# Altium PCB PCB Ruler v1.0.PcbDoc
Units mm, origin at the board's own origin, x right, y up, seen from the top; angles counter-clockwise.
Board outline 100 x 32 mm, 2 copper layers (Top Layer, Bottom Layer), stack 1.571 mm thick; 28 components, 0 nets, 449 pads, 0 vias.
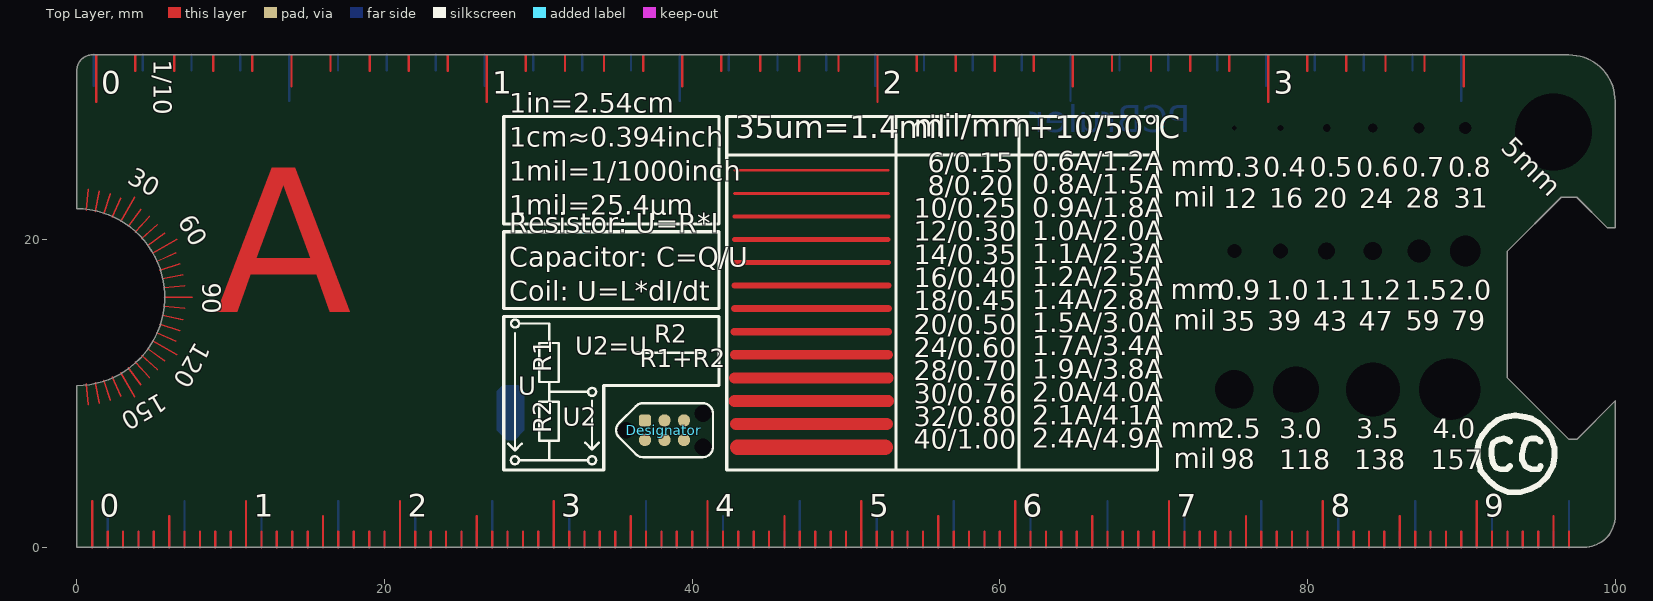
[diagram p0: Top Layer view]
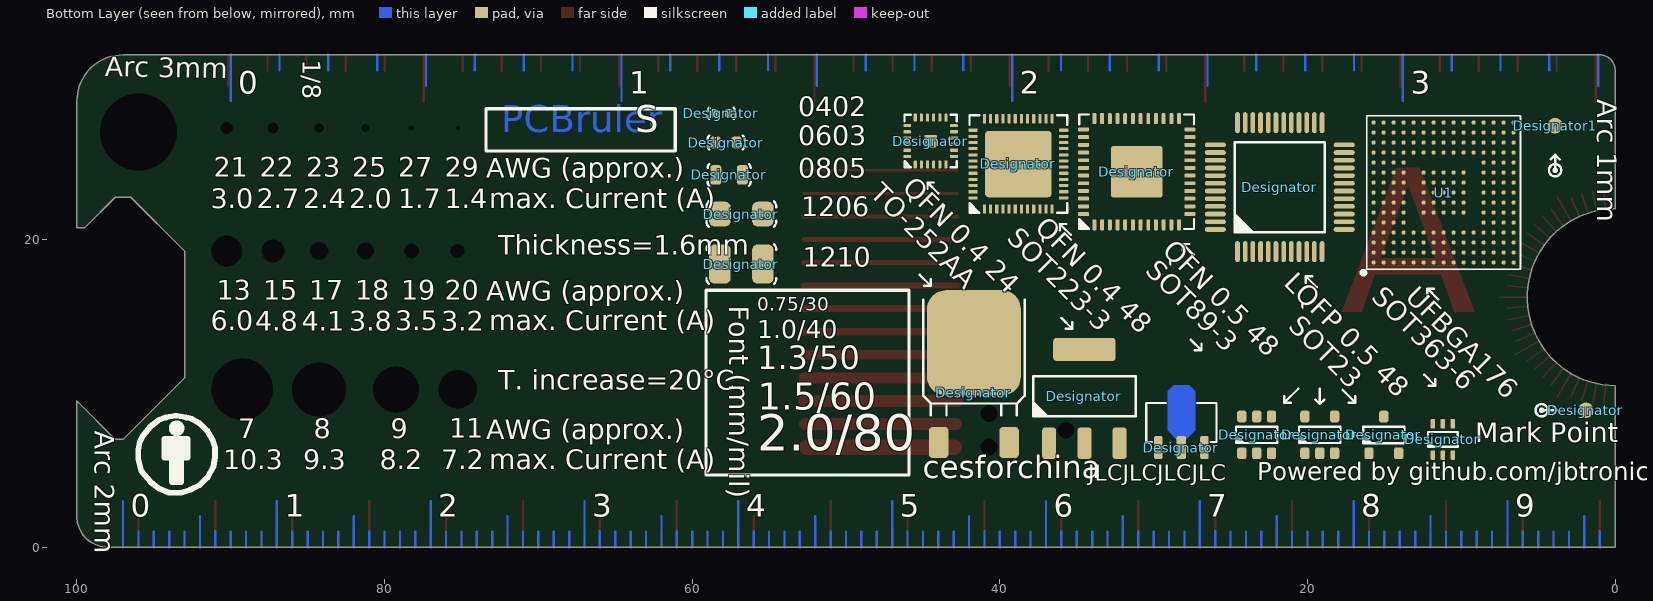
[diagram p1: Bottom Layer view, seen from below]

## Layer stack, top to bottom
Top Solder: solder mask 0.0102, Solder Resist, Dk 3.5
Top Layer: signal copper 0.0356
Dielectric 1: dielectric 1.5, FR-4, Dk 4.8
Bottom Layer: signal copper 0.0356
Bottom Solder: solder mask 0.0102, Solder Resist, Dk 3.5

## Board outline
0,0 0,10.5 ccw(c-0.038,16.25) 0,22 0,31 cw(c1,31) 1,32 97,32 cw(c97,29) 100,29 100,20.75 99.5,20.75 97.5,22.75 96.5,22.75 93,19.25 93,11 97,7 97.5,7 100,9.5 100,2 cw(c98,2) 98,0

## Design rules (kind name [scope] priority, off if disabled: settings)
Clearance [All] p1: gap=0 ignorepadtopadclearanceinfootprint=TRUE
PolygonConnect [All] p1: connectstyle=Relief reliefconductorwidth=0.254 reliefentries=4 polygonreliefangle="90 Angle" airgapwidth=0.254
RoutingVias [All] p1: holewidth=0.711 width=1.27 viastyle="Through Hole" minholewidth=0.711 minwidth=1.27 maxholewidth=0.711 maxwidth=1.27
SolderMaskExpansion [All] p1: expansion=0.102
Width [All] p1: maxlimit=2.032 minlimit=0.1 preferedwidth=0.203 minimp=50.000000 maximp=50.000000 favimp=50.000000
30 further rules are at their usual default settings.

## Components (designator, comment, footprint, x,y, rotation, side; value= is the part's Value field where it differs from the comment)
Designator "Comment" "Mark 1" 1.9,8.9 r0 bottom
Designator "Comment" LQFP_P0.5_48 21.8,23.4 r90 bottom
Designator "Comment" QFN_P0.5_48 31.1,24.403 r90 bottom
Designator "Comment" QFN_P0.4_48 38.797,24.903 r90 bottom
Designator "Comment" TO-252AA 43.972,6.8 r180 bottom
Designator "Comment" SOT223-3 34.5,9.8 r90 bottom
Designator "Comment" SOT89-3 28.2,8.1 r90 bottom
Designator "Comment" SOT363-6 11.2,7 r90 bottom
Designator "Comment" SOT23-6 23.3,7.3 r90 bottom
Designator "Comment" SOT23-5 19.2,7.3 r90 bottom
Designator "Comment" SOT23-3 15.035,7.294 r90 bottom
Designator "Comment" QFN_P0.4_24 44.5,26.4 r90 bottom
Designator "Comment" "C 0805" 57.6,24.2 r0 bottom
Designator "Comment" "C 0603" 57.8,26.303 r180 bottom
Designator "Comment" "C 0402" 58.1,28.2 r180 bottom
Designator "Comment" "C 1210" 56.8,18.4 r180 bottom
Designator "Comment" "C 1206" 56.8,21.653 r180 bottom
Designator "Comment" "Flash Herder 6P" 38.2,7.6 r0 top
Designator1 "Comment" "Mark 1" 3.9,27.4 r0 bottom
REF "Inch_Ruler_3.5in_10" INCH_RULER_3.5IN_10 -85,130 r0 top
REF "Degree_Scale" DEGREE_SCALE -85,130 r0 top
REF "Metric_Ruler_90mm" METRIC_RULER_96MM -85,130 r0 top
REF1 "Voltage Divider" VOLTAGE_DIVIDER -84.96,130.039 r0 top (schematic designator REF)
REF2 "" SYMBOL_CREATIVECOMMONS_SILKTOP_TYPE2_SMALL -85.343,130.214 r0 top (schematic designator REF)
REF3 "" SYMBOL_CC-ATTRIBUTION_SILKTOP_SMALL -85.488,130.287 r0 bottom (schematic designator REF)
REF_1 "Inch_Ruler_3.5in_8" INCH_RULER_3.5IN_8 -85,130 r0 bottom (schematic designator REF)
REF_1 "Metric_Ruler_90mm" METRIC_RULER_96MM -85,130 r0 bottom (schematic designator REF)
U1 "STM32F765IIK6" UFBGA176 11.15,23.05 r90 bottom

## Footprints (in the part's own frame and the unit in brackets; to place one, negate y for a bottom-side part, rotate by r counter-clockwise, add the part's x,y. Pads: shape width x height; smd on the part's side, far side on the other; paste and mask are expansions set on the pad)
"C 0402" [mil] "无极性贴片电容"
  rrect50% 19x21 smd: 1(-18.5,0) 2(18.5,0)
  silkscreen extent -35,-14 35,14
"C 0603" [mil] "无极性贴片电容"
  rrect50% 26x30 smd: 1(-27,0) 2(27,0)
  silkscreen extent -47,-18 47,18
"C 0805" [mil] "无极性贴片电容"
  rrect50% 28x50 smd: 1(-34,0) 2(34,0)
  silkscreen extent -55,-28 55,28
"C 1206" [mil] "无极性贴片电容"
  rrect50% 55x63 smd: 1(-55,0) 2(55,0)
  silkscreen extent -90,-32 90,32
"C 1210" [mil] "无极性贴片电容"
  rrect50% 55x100 smd: 1(-55,0) 2(55,0)
  silkscreen extent -90,-51 90,51
DEGREE_SCALE [mm]
  Top Layer lines w0.1: 85.594,-119.394 85.736,-120.75 ; 85.594,-108.092 85.736,-106.736 ; 86.181,-119.3 86.465,-120.635 ; 86.181,-108.185 86.465,-106.851 ; 86.755,-119.147 87.177,-120.443 ; 86.755,-108.339 87.177,-107.042 ; 87.311,-118.933 87.865,-120.179 ; 87.311,-108.552 87.865,-107.307 ; 87.841,-118.663 88.75,-120.238 ; 87.841,-108.822 88.75,-107.248 ; 88.339,-118.34 89.141,-119.443 ; 88.339,-109.146 89.141,-108.043 ; 88.802,-117.965 89.714,-118.979 ; 88.802,-109.52 89.714,-108.507 ; 89.222,-117.545 90.236,-118.457 ; 89.222,-109.941 90.236,-109.028 ; 89.596,-117.083 90.7,-117.884 ; 89.596,-110.403 90.7,-109.602 ; 89.92,-116.584 91.495,-117.493 ; 89.92,-110.902 91.495,-109.993 ; 90.19,-116.054 91.436,-116.609 ; 90.19,-111.432 91.436,-110.877 ; 90.404,-115.499 91.7,-115.92 ; 90.404,-111.987 91.7,-111.566 ; 90.558,-114.924 91.891,-115.208 ; 90.558,-112.562 91.891,-112.278 ; 90.651,-114.337 92.007,-114.479 ; 90.651,-113.149 92.007,-113.007 ; 90.682,-113.743 92.5,-113.743
"Flash Herder 6P" [mm]
  rrect50% 0.8x0.8 smd: 1(-1.27,0.635)
  round 0.8 smd: 2(-1.27,-0.635) 3(0,0.635) 4(0,-0.635) 5(1.27,0.635) 6(1.27,-0.635)
  round 0 hole 1.1 unplated mask+0: ""(-2.5,0) ""(2.5,-1.1) ""(2.5,1.1)
  silkscreen extent -3.15,-1.75 3.15,1.75
INCH_RULER_3.5IN_8 [mm]
  Top Layer lines w0.15: 86.1,100 86.1,98 ; 89.275,99 89.275,98 ; 92.45,99 92.45,98 ; 95.625,99 95.625,98 ; 98.8,101 98.8,98 ; 101.975,99 101.975,98 ; 105.15,99 105.15,98 ; 108.325,99 108.325,98 ; 111.5,100 111.5,98 ; 114.675,99 114.675,98 ; 117.85,99 117.85,98 ; 121.025,99 121.025,98 ; 124.2,101 124.2,98 ; 127.375,99 127.375,98 ; 130.55,99 130.55,98 ; 133.725,99 133.725,98 ; 136.9,100 136.9,98 ; 140.075,99 140.075,98 ; 143.25,99 143.25,98 ; 146.425,99 146.425,98 ; 149.6,101 149.6,98 ; 152.775,99 152.775,98 ; 155.95,99 155.95,98 ; 159.125,99 159.125,98 ; 162.3,100 162.3,98 ; 165.475,99 165.475,98 ; 168.65,99 168.65,98 ; 171.825,99 171.825,98 ; 175,101 175,98
INCH_RULER_3.5IN_10 [mm]
  Top Layer lines w0.15: 86.25,-101.061 86.25,-98.013 ; 88.79,-99.029 88.79,-98.013 ; 91.33,-99.029 91.33,-98.013 ; 93.87,-99.029 93.87,-98.013 ; 96.41,-99.029 96.41,-98.013 ; 98.95,-100.045 98.95,-98.013 ; 101.49,-99.029 101.49,-98.013 ; 104.03,-99.029 104.03,-98.013 ; 106.57,-99.029 106.57,-98.013 ; 109.11,-99.029 109.11,-98.013 ; 111.65,-101.061 111.65,-98.013 ; 114.19,-99.029 114.19,-98.013 ; 116.73,-99.029 116.73,-98.013 ; 119.27,-99.029 119.27,-98.013 ; 121.81,-99.029 121.81,-98.013 ; 124.35,-100.045 124.35,-98.013 ; 126.89,-99.029 126.89,-98.013 ; 129.43,-99.029 129.43,-98.013 ; 131.97,-99.029 131.97,-98.013 ; 134.51,-99.029 134.51,-98.013 ; 137.05,-101.061 137.05,-98.013 ; 139.59,-99.029 139.59,-98.013 ; 142.13,-99.029 142.13,-98.013 ; 144.67,-99.029 144.67,-98.013 ; 147.21,-99.029 147.21,-98.013 ; 149.75,-100.045 149.75,-98.013 ; 152.29,-99.029 152.29,-98.013 ; 154.83,-99.029 154.83,-98.013 ; 157.37,-99.029 157.37,-98.013 ; 159.91,-99.029 159.91,-98.013 ; 162.45,-101.061 162.45,-98.013 ; 164.99,-99.029 164.99,-98.013 ; 167.53,-99.029 167.53,-98.013 ; 170.07,-99.029 170.07,-98.013 ; 172.61,-99.029 172.61,-98.013 ; 175.15,-100.045 175.15,-98.013
LQFP_P0.5_48 [mil]
  oval 54x12 smd: 1(-165,108.27) 2(-165,88.58) 3(-165,68.9) 4(-165,49.21) 5(-165,29.53) 6(-165,9.84) 7(-165,-9.84) 8(-165,-29.53) 9(-165,-49.21) 10(-165,-68.9) 11(-165,-88.58) 12(-165,-108.27) 25(165,-108.27) 26(165,-88.58) 27(165,-68.9) 28(165,-49.21) 29(165,-29.53) 30(165,-9.84) 31(165,9.84) 32(165,29.53) 33(165,49.21) 34(165,68.9) 35(165,88.58) 36(165,108.27)
  oval 12x54 smd: 13(-108.27,-165) 14(-88.58,-165) 15(-68.9,-165) 16(-49.21,-165) 17(-29.53,-165) 18(-9.84,-165) 19(9.84,-165) 20(29.53,-165) 21(49.21,-165) 22(68.9,-165) 23(88.58,-165) 24(108.27,-165) 37(108.27,165) 38(88.58,165) 39(68.9,165) 40(49.21,165) 41(29.53,165) 42(9.84,165) 43(-9.84,165) 44(-29.53,165) 45(-49.21,165) 46(-68.9,165) 47(-88.58,165) 48(-108.27,165)
  silkscreen extent -115,-115 115,115
"Mark 1" [mm] "光学定位点，直径1mm"
  round 1 smd paste-1 mask+0.635: Mark(0,0)
  Top Layer pour cut-out: 0,-1.143 -0.437,-1.056 -0.808,-0.808 -1.056,-0.437 -1.143,0 -1.143,0 -1.056,0.437 -0.808,0.808 -0.437,1.056 0,1.143 0,1.143 0.437,1.056 0.808,0.808 1.056,0.437 1.143,0 1.143,0 1.056,-0.437 0.808,-0.808 0.437,-1.056 0,-1.143
METRIC_RULER_96MM [mm]
  Top Layer lines w0.15: 86,-130 86,-127 ; 87,-130 87,-129 ; 88,-130 88,-129 ; 89,-130 89,-129 ; 90,-130 90,-129 ; 91,-130 91,-128 ; 92,-130 92,-129 ; 93,-130 93,-129 ; 94,-130 94,-129 ; 95,-130 95,-129 ; 96,-130 96,-127 ; 97,-130 97,-129 ; 98,-130 98,-129 ; 99,-130 99,-129 ; 100,-130 100,-129 ; 101,-130 101,-128 ; 102,-130 102,-129 ; 103,-130 103,-129 ; 104,-130 104,-129 ; 105,-130 105,-129 ; 106,-130 106,-127 ; 107,-130 107,-129 ; 108,-130 108,-129 ; 109,-130 109,-129 ; 110,-130 110,-129 ; 111,-130 111,-128 ; 112,-130 112,-129 ; 113,-130 113,-129 ; 114,-130 114,-129 ; 115,-130 115,-129 ; 116,-130 116,-127 ; 117,-130 117,-129 ; 118,-130 118,-129 ; 119,-130 119,-129 ; 120,-130 120,-129 ; 121,-130 121,-128 ; 122,-130 122,-129 ; 123,-130 123,-129 ; 124,-130 124,-129 ; 125,-130 125,-129 ; 126,-130 126,-127 ; 127,-130 127,-129 ; 128,-130 128,-129 ; 129,-130 129,-129 ; 130,-130 130,-129 ; 131,-130 131,-128 ; 132,-130 132,-129 ; 133,-130 133,-129 ; 134,-130 134,-129 ; 135,-130 135,-129 ; 136,-130 136,-127 ; 137,-130 137,-129 ; 138,-130 138,-129 ; 139,-130 139,-129 ; 140,-130 140,-129 ; 141,-130 141,-128 ; 142,-130 142,-129 ; 143,-130 143,-129 ; 144,-130 144,-129 ; 145,-130 145,-129 ; 146,-130 146,-127 ; 147,-130 147,-129 ; 148,-130 148,-129 ; 149,-130 149,-129 ; 150,-130 150,-129 ; 151,-130 151,-128 ; 152,-130 152,-129 ; 153,-130 153,-129 ; 154,-130 154,-129 ; 155,-130 155,-129 ; 156,-130 156,-127 ; 157,-130 157,-129 ; 158,-130 158,-129 ; 159,-130 159,-129 ; 160,-130 160,-129 ; 161,-130 161,-128 ; 162,-130 162,-129 ; 163,-130 163,-129 ; 164,-130 164,-129 ; 165,-130 165,-129 ; 166,-130 166,-127 ; 167,-130 167,-129 ; 168,-130 168,-129 ; 169,-130 169,-129 ; 170,-130 170,-129 ; 171,-130 171,-128 ; 172,-130 172,-129 ; 173,-130 173,-129 ; 174,-130 174,-129 ; 175,-130 175,-129 ; 176,-130 176,-127 ; 177,-130 177,-129 ; 178,-130 178,-129 ; 179,-130 179,-129 ; 180,-130 180,-129 ; 181,-130 181,-128 ; 182,-130 182,-129
QFN_P0.4_24 [mil]
  rrect50% 20x8 smd: 1(-60,39.37) 2(-60,23.62) 3(-60,7.87) 4(-60,-7.87) 5(-60,-23.62) 6(-60,-39.37) 13(60,-39.37) 14(60,-23.62) 15(60,-7.87) 16(60,7.87) 17(60,23.62) 18(60,39.37)
  rrect50% 8x20 smd: 7(-39.37,-60) 8(-23.62,-60) 9(-7.87,-60) 10(7.87,-60) 11(23.62,-60) 12(39.37,-60) 19(39.37,60) 20(23.62,60) 21(7.87,60) 22(-7.87,60) 23(-23.62,60) 24(-39.37,60)
  rrect20% 32x32 smd: 25(0,0)
  silkscreen extent -67,-67 67,67
QFN_P0.4_48 [mil]
  rrect50% 24x8 smd: 1(-115,86.61) 2(-115,70.87) 3(-115,55.12) 4(-115,39.37) 5(-115,23.62) 6(-115,7.87) 7(-115,-7.87) 8(-115,-23.62) 9(-115,-39.37) 10(-115,-55.12) 11(-115,-70.87) 12(-115,-86.61) 25(116,-86.61) 26(116,-70.87) 27(116,-55.12) 28(116,-39.37) 29(116,-23.62) 30(116,-7.87) 31(116,7.87) 32(116,23.62) 33(116,39.37) 34(116,55.12) 35(116,70.87) 36(116,86.61)
  rrect50% 8x24 smd: 13(-86.61,-116) 14(-70.87,-116) 15(-55.12,-116) 16(-39.37,-116) 17(-23.62,-116) 18(-7.87,-116) 19(7.87,-116) 20(23.62,-116) 21(39.37,-116) 22(55.12,-116) 23(70.87,-116) 24(86.61,-116) 37(86.61,116) 38(70.87,116) 39(55.12,116) 40(39.37,116) 41(23.62,116) 42(7.87,116) 43(-7.87,116) 44(-23.62,116) 45(-39.37,116) 46(-55.12,116) 47(-70.87,116) 48(-86.61,116)
  rrect10% 170x170 smd paste-173.23 mask+1.97: 49(0,0)
  rrect20% 50x50 on Bottom Paste mask+1.97: Paste1(0,0) Paste2(-55,55) Paste3(-55,-55) Paste4(55,-55) Paste5(55,55) Paste6(55,0) Paste7(-55,0) Paste8(0,55) Paste9(0,-55)
  silkscreen extent -125,-125 125,125
QFN_P0.5_48 [mil]
  rrect50% 28x10 smd: 1(-136,108.27) 2(-136,88.58) 3(-136,68.9) 4(-136,49.21) 5(-136,29.53) 6(-136,9.84) 7(-136,-9.84) 8(-136,-29.53) 9(-136,-49.21) 10(-136,-68.9) 11(-136,-88.58) 12(-136,-108.27) 25(136,-108.27) 26(136,-88.58) 27(136,-68.9) 28(136,-49.21) 29(136,-29.53) 30(136,-9.84) 31(136,9.84) 32(136,29.53) 33(136,49.21) 34(136,68.9) 35(136,88.58) 36(136,108.27)
  rrect50% 10x28 smd: 13(-108.27,-136) 14(-88.58,-136) 15(-68.9,-136) 16(-49.21,-136) 17(-29.53,-136) 18(-9.84,-136) 19(9.84,-136) 20(29.53,-136) 21(49.21,-136) 22(68.9,-136) 23(88.58,-136) 24(108.27,-136) 37(108.27,136) 38(88.58,136) 39(68.9,136) 40(49.21,136) 41(29.53,136) 42(9.84,136) 43(-9.84,136) 44(-29.53,136) 45(-49.21,136) 46(-68.9,136) 47(-88.58,136) 48(-108.27,136)
  rrect10% 132x132 smd: 49(0,0)
  silkscreen extent -147,-147 147,147
SOT23-3 [mil]
  rrect50% 30x24 smd: 1(-47,38) 2(-47,-38) 3(47,0)
  silkscreen extent -21,-53 21,53
SOT23-5 [mil]
  rrect50% 30x24 smd: 1(-47,38) 2(-47,0) 3(-47,-38) 4(47,-38) 5(47,38)
  silkscreen extent -21,-53 21,53
SOT23-6 [mil]
  rrect50% 30x24 smd: 1(-47,38) 2(-47,0) 3(-47,-38) 4(47,-38) 5(47,0) 6(47,38)
  silkscreen extent -21,-53 21,53
SOT89-3 [mil]
  rrect50% 60x22 smd: 1(-64,59.06) 3(-64,-59.06)
  rrect50% 60x24 smd: 2(-64,0)
  Top Layer region: -45,10 -20,35 80,35 95,20 95,-20 80,-35 -20,-35 -45,-10
  silkscreen extent -50,-90 50,90
SOT223-3 [mil]
  rrect40% 80x36 smd: 1(-120,90.16) 2(-120,0) 3(-120,-90.16)
  rrect30% 60x160 smd: 4(120,0)
  silkscreen extent -51,-131 51,131
SOT363-6 [mil]
  rrect50% 24x12 smd: 1(-40,25.59) 2(-40,0) 3(-40,-25.59) 4(40,-25.59) 5(40,0) 6(40,25.59)
  silkscreen extent -19,-38 19,38
SYMBOL_CC-ATTRIBUTION_SILKTOP_SMALL [mm]
  silkscreen extent 176.5,121.75 181.5,126.75
SYMBOL_CREATIVECOMMONS_SILKTOP_TYPE2_SMALL [mm]
  silkscreen extent 176.4,-126.65 181.4,-121.65
TO-252AA [mil]
  rrect40% 50x80 smd: 1(0,0) 3(180,0)
  rrect40% 240x270 smd: 4(90,255)
  silkscreen extent -40,70 220,365
UFBGA176 [mm]
  round 0.27 smd: A1(-4.55,4.55) A2(-3.9,4.55) A3(-3.25,4.55) A4(-2.6,4.55) A5(-1.95,4.55) A6(-1.3,4.55) A7(-0.65,4.55) A8(0,4.55) A9(0.65,4.55) A10(1.3,4.55) A11(1.95,4.55) A12(2.6,4.55) A13(3.25,4.55) A14(3.9,4.55) A15(4.55,4.55) B1(-4.55,3.9) B2(-3.9,3.9) B3(-3.25,3.9) B4(-2.6,3.9) B5(-1.95,3.9) B6(-1.3,3.9) B7(-0.65,3.9) B8(0,3.9) B9(0.65,3.9) B10(1.3,3.9) B11(1.95,3.9) B12(2.6,3.9) B13(3.25,3.9) B14(3.9,3.9) B15(4.55,3.9) C1(-4.55,3.25) C2(-3.9,3.25) C3(-3.25,3.25) C4(-2.6,3.25) C5(-1.95,3.25) C6(-1.3,3.25) C7(-0.65,3.25) C8(0,3.25) C9(0.65,3.25) C10(1.3,3.25) C11(1.95,3.25) C12(2.6,3.25) C13(3.25,3.25) C14(3.9,3.25) C15(4.55,3.25) D1(-4.55,2.6) D2(-3.9,2.6) D3(-3.25,2.6) D4(-2.6,2.6) D5(-1.95,2.6) D6(-1.3,2.6) D7(-0.65,2.6) D8(0,2.6) D9(0.65,2.6) D10(1.3,2.6) D11(1.95,2.6) D12(2.6,2.6) D13(3.25,2.6) D14(3.9,2.6) D15(4.55,2.6) E1(-4.55,1.95) E2(-3.9,1.95) E3(-3.25,1.95) E4(-2.6,1.95) E12(2.6,1.95) E13(3.25,1.95) E14(3.9,1.95) E15(4.55,1.95) F1(-4.55,1.3) F2(-3.9,1.3) F3(-3.25,1.3) F4(-2.6,1.3) F6(-1.3,1.3) F7(-0.65,1.3) F8(0,1.3) F9(0.65,1.3) F10(1.3,1.3) F12(2.6,1.3) F13(3.25,1.3) F14(3.9,1.3) F15(4.55,1.3) G1(-4.55,0.65) G2(-3.9,0.65) G3(-3.25,0.65) G4(-2.6,0.65) G6(-1.3,0.65) G7(-0.65,0.65) G8(0,0.65) G9(0.65,0.65) G10(1.3,0.65) G12(2.6,0.65) G13(3.25,0.65) G14(3.9,0.65) G15(4.55,0.65) H1(-4.55,0) H2(-3.9,0) H3(-3.25,0) H4(-2.6,0) H6(-1.3,0) H7(-0.65,0) H8(0,0) H9(0.65,0) H10(1.3,0) H12(2.6,0) H13(3.25,0) H14(3.9,0) H15(4.55,0) J1(-4.55,-0.65) J2(-3.9,-0.65) J3(-3.25,-0.65) J4(-2.6,-0.65) J6(-1.3,-0.65) J7(-0.65,-0.65) J8(0,-0.65) J9(0.65,-0.65) J10(1.3,-0.65) J12(2.6,-0.65) J13(3.25,-0.65) J14(3.9,-0.65) J15(4.55,-0.65) K1(-4.55,-1.3) K2(-3.9,-1.3) K3(-3.25,-1.3) K4(-2.6,-1.3) K6(-1.3,-1.3) K7(-0.65,-1.3) K8(0,-1.3) K9(0.65,-1.3) K10(1.3,-1.3) K12(2.6,-1.3) K13(3.25,-1.3) K14(3.9,-1.3) K15(4.55,-1.3) L1(-4.55,-1.95) L2(-3.9,-1.95) L3(-3.25,-1.95) L4(-2.6,-1.95) L12(2.6,-1.95) L13(3.25,-1.95) L14(3.9,-1.95) L15(4.55,-1.95) M1(-4.55,-2.6) M2(-3.9,-2.6) M3(-3.25,-2.6) M4(-2.6,-2.6) M5(-1.95,-2.6) M6(-1.3,-2.6) M7(-0.65,-2.6) M8(0,-2.6) M9(0.65,-2.6) M10(1.3,-2.6) M11(1.95,-2.6) M12(2.6,-2.6) M13(3.25,-2.6) M14(3.9,-2.6) M15(4.55,-2.6) N1(-4.55,-3.25) N2(-3.9,-3.25) N3(-3.25,-3.25) N4(-2.6,-3.25) N5(-1.95,-3.25) N6(-1.3,-3.25) N7(-0.65,-3.25) N8(0,-3.25) N9(0.65,-3.25) N10(1.3,-3.25) N11(1.95,-3.25) N12(2.6,-3.25) N13(3.25,-3.25) N14(3.9,-3.25) N15(4.55,-3.25) P1(-4.55,-3.9) P2(-3.9,-3.9) P3(-3.25,-3.9) P4(-2.6,-3.9) P5(-1.95,-3.9) P6(-1.3,-3.9) P7(-0.65,-3.9) P8(0,-3.9) P9(0.65,-3.9) P10(1.3,-3.9) P11(1.95,-3.9) P12(2.6,-3.9) P13(3.25,-3.9) P14(3.9,-3.9) P15(4.55,-3.9) R1(-4.55,-4.55) R2(-3.9,-4.55) R3(-3.25,-4.55) R4(-2.6,-4.55) R5(-1.95,-4.55) R6(-1.3,-4.55) R7(-0.65,-4.55) R8(0,-4.55) R9(0.65,-4.55) R10(1.3,-4.55) R11(1.95,-4.55) R12(2.6,-4.55) R13(3.25,-4.55) R14(3.9,-4.55) R15(4.55,-4.55)
  silkscreen extent -5.33,-5 5,5.34
VOLTAGE_DIVIDER [mm]
  silkscreen extent 112.99,-124.65 125.82,-115.24

## Free pads (board coordinates)
  round 0 hole 0.3 unplated: 5(75.25,27.25)
  round 0 hole 0.4 unplated: 6(78.25,27.25)
  round 0 hole 0.5 unplated: 7(81.25,27.25)
  round 0 hole 0.6 unplated: 8(84.25,27.25)
  round 0 hole 0.7 unplated: 9(87.25,27.25)
  round 0 hole 5 unplated: 10(96,27)
  round 0 hole 0.8 unplated: 11(90.25,27.25)
  round 0 hole 2 unplated: 12(90.25,19.25)
  round 0 hole 1.5 unplated: 13(87.25,19.25)
  round 0 hole 1.2 unplated: 14(84.25,19.25)
  round 0 hole 0.9 unplated: 15(75.25,19.25)
  round 0 hole 1 unplated: 16(78.25,19.25)
  round 0 hole 1.1 unplated: 17(81.25,19.25)
  round 0 hole 2.5 unplated: 18(75.25,10.25)
  round 0 hole 3 unplated: 19(79.25,10.25)
  round 0 hole 3.5 unplated: 20(84.25,10.25)
  round 0 hole 4 unplated: 21(89.25,10.25)

## Nets (pads, with @x,y where several pads share a name; then routed paths per layer and width w, separated by ;. In a path a pad name is that pad's centre, name@x,y a point inside that pad or via, vN(x,y) a via of type N, cw(c..) or ccw(c..) an arc to the next point about the centre after c; other vN are vias at no path point)
pads on no net: Designator1.Mark Designator. Designator.1 Designator.2 Designator.3 Designator.4 Designator.5 Designator.6 Designator.7 Designator.8 Designator.9 Designator.10 Designator.11 Designator.12 Designator.13 Designator.14 Designator.15 Designator.16 Designator.17 Designator.18 Designator.19 Designator.20 Designator.21 Designator.22 Designator.23 Designator.24 Designator.25 Designator.26 Designator.27 Designator.28 Designator.29 Designator.30 Designator.31 Designator.32 Designator.33 Designator.34 Designator.35 Designator.36 Designator.37 Designator.38 Designator.39 Designator.40 Designator.41 Designator.42 Designator.43 Designator.44 Designator.45 Designator.46 Designator.47 Designator.48 Designator.49 Designator.Mark Designator.Paste1 Designator.Paste2 Designator.Paste3 Designator.Paste4 Designator.Paste5 Designator.Paste6 Designator.Paste7 Designator.Paste8 Designator.Paste9 U1.A1 U1.A2 U1.A3 U1.A4 U1.A5 U1.A6 U1.A7 U1.A8 U1.A9 U1.A10 U1.A11 U1.A12 U1.A13 U1.A14 U1.A15 U1.B1 U1.B2 U1.B3 U1.B4 U1.B5 U1.B6 U1.B7 U1.B8 U1.B9 U1.B10 U1.B11 U1.B12 U1.B13 U1.B14 U1.B15 U1.C1 U1.C2 U1.C3 U1.C4 U1.C5 U1.C6 U1.C7 U1.C8 U1.C9 U1.C10 U1.C11 U1.C12 U1.C13 U1.C14 U1.C15 U1.D1 U1.D2 U1.D3 U1.D4 U1.D5 U1.D6 U1.D7 U1.D8 U1.D9 U1.D10 U1.D11 U1.D12 U1.D13 U1.D14 U1.D15 U1.E1 U1.E2 U1.E3 U1.E4 U1.E12 U1.E13 U1.E14 U1.E15 U1.F1 U1.F2 U1.F3 U1.F4 U1.F6 U1.F7 U1.F8 U1.F9 U1.F10 U1.F12 U1.F13 U1.F14 U1.F15 U1.G1 U1.G2 U1.G3 U1.G4 U1.G6 U1.G7 U1.G8 U1.G9 U1.G10 U1.G12 U1.G13 U1.G14 U1.G15 U1.H1 U1.H2 U1.H3 U1.H4 U1.H6 U1.H7 U1.H8 U1.H9 U1.H10 U1.H12 U1.H13 U1.H14 U1.H15 U1.J1 U1.J2 U1.J3 U1.J4 U1.J6 U1.J7 U1.J8 U1.J9 U1.J10 U1.J12 U1.J13 U1.J14 U1.J15 U1.K1 U1.K2 U1.K3 U1.K4 U1.K6 U1.K7 U1.K8 U1.K9 U1.K10 U1.K12 U1.K13 U1.K14 U1.K15 U1.L1 U1.L2 U1.L3 U1.L4 U1.L12 U1.L13 U1.L14 U1.L15 U1.M1 U1.M2 U1.M3 U1.M4 U1.M5 U1.M6 U1.M7 U1.M8 U1.M9 U1.M10 U1.M11 U1.M12 U1.M13 U1.M14 U1.M15 U1.N1 U1.N2 U1.N3 U1.N4 U1.N5 U1.N6 U1.N7 U1.N8 U1.N9 U1.N10 U1.N11 U1.N12 U1.N13 U1.N14 U1.N15 U1.P1 U1.P2 U1.P3 U1.P4 U1.P5 U1.P6 U1.P7 U1.P8 U1.P9 U1.P10 U1.P11 U1.P12 U1.P13 U1.P14 U1.P15 U1.R1 U1.R2 U1.R3 U1.R4 U1.R5 U1.R6 U1.R7 U1.R8 U1.R9 U1.R10 U1.R11 U1.R12 U1.R13 U1.R14 U1.R15
copper on no net: | length 129.4
  Top Layer w0.15: 42.75,24.5 46.25,24.5 52.25,24.5 52.75,24.5
  Top Layer w0.2: 42.75,23 52.75,23
  Top Layer w0.254: 42.75,21.5 52.75,21.5
  Top Layer w0.3: 42.75,20 52.75,20
  Top Layer w0.35: 42.75,18.5 52.75,18.5
  Top Layer w0.4: 42.75,17 52.75,17
  Top Layer w0.45: 42.75,15.5 52.75,15.5
  Top Layer w0.5: 42.75,14 52.75,14
  Top Layer w0.6: 42.75,12.5 52.75,12.5
  Top Layer w0.7: 42.75,11 52.75,11
  Top Layer w0.762: 42.75,9.5 52.75,9.5
  Top Layer w0.8: 42.85,8 52.65,8
  Top Layer w1: 42.95,6.5 52.55,6.5

## Other copper
Top Layer:
  text "A" at 9,11.5 h20
Bottom Layer:
  text "PCBruler" at 72.4,26.4 h3

## Silkscreen, mask and mechanical layers (free items; w line width, h text height)
Top Overlay:
  lines w0.2: 42.25,25.5 70.25,25.5 ; 53.25,5 53.25,28 ; 61.25,5 61.25,28 ; 27.75,5 27.75,15 41.75,15 41.75,10.5 34.25,10.5 34.25,5 27.75,5 ; 27.75,15.5 27.75,20.5 41.75,20.5 41.75,15.5 27.75,15.5 ; 27.75,21 27.75,28 41.75,28 41.75,21 27.75,21 ; 42.25,5 70.25,5 70.25,5.5 70.25,28 42.25,28 42.25,10.5 42.25,5.5 42.25,5
  text "1/10" at 4.6,31.7 h2 r270
  text "mil/mm" at 54.402,26.185 h2.5
  text "35um=1.4mil" at 42.8,26.106 h2.5
  text "+10/50°C" at 61.895,26.079 h2.5
  text "5mm" at 92.2,25.6 h2.2 r315
  text "0.6A/1.2A" at 62.094,24.035 h2.2
  text "6/0.15" at 55.318,23.951 h2.2
  text "mm" at 71.106,23.694 h2.2
  text "0.3" at 74.179,23.671 h2.2
  text "0.4" at 77.138,23.671 h2.2
  text "0.5" at 80.152,23.671 h2.2
  text "0.6" at 83.169,23.671 h2.2
  text "0.7" at 86.129,23.671 h2.2
  text "0.8" at 89.163,23.671 h2.2
  text "0.8A/1.5A" at 62.094,22.535 h2.2
  text "8/0.20" at 55.313,22.455 h2.2
  text "mil" at 71.31,21.694 h2.2
  text "16" at 77.528,21.655 h2.2
  text "20" at 80.378,21.631 h2.2
  text "28" at 86.399,21.641 h2.2
  text "31" at 89.518,21.635 h2.2
  text "24" at 83.374,21.62 h2.2
  text "12" at 74.531,21.602 h2.2
  text "1in=2.54cm / 1cm≈0.394inch / 1mil=1/1000inch / 1mil=25.4µm" at 28.1,21.2 h2.2
  text "0.9A/1.8A" at 62.094,21.037 h2.2
  text "10/0.25" at 54.416,20.979 h2.2
  text "1.0A/2.0A" at 62.094,19.535 h2.2
  text "12/0.30" at 54.416,19.48 h2.2
  text "1.1A/2.3A" at 62.095,18.031 h2.2
  text "14/0.35" at 54.416,17.979 h2.2
  text "1.2A/2.5A" at 62.094,16.535 h2.2
  text "16/0.40" at 54.416,16.48 h2.2
  text "mm" at 71.106,15.694 h2.2
  text "0.9" at 74.151,15.673 h2.2
  text "1.0" at 77.305,15.671 h2.2
  text "1.1" at 80.451,15.671 h2.2
  text "1.2" at 83.334,15.671 h2.2
  text "1.5" at 86.315,15.671 h2.2
  text "2.0" at 89.182,15.671 h2.2
  text "Resistor: U=R*I / Capacitor: C=Q/U / Coil: U=L*dI/dt" at 28.1,15.6 h2.2
  text "1.4A/2.8A" at 62.094,15.035 h2.2
  text "18/0.45" at 54.416,14.979 h2.2
  text "mil" at 71.31,13.694 h2.2
  text "39" at 77.38,13.673 h2.2
  text "59" at 86.373,13.673 h2.2
  text "79" at 89.351,13.673 h2.2
  text "35" at 74.381,13.649 h2.2
  text "43" at 80.371,13.635 h2.2
  text "47" at 83.321,13.651 h2.2
  text "120" at 7.4,13.6 h2 r240
  text "1.5A/3.0A" at 62.094,13.535 h2.2
  text "20/0.50" at 54.419,13.432 h2.2
  text "1.7A/3.4A" at 62.094,12.035 h2.2
  text "24/0.60" at 54.419,11.932 h2.2
  text "1.9A/3.8A" at 62.094,10.537 h2.2
  text "28/0.70" at 54.419,10.432 h2.2
  text "150" at 5.2,10.4 h2 r210
  text "2.0A/4.0A" at 62.094,9.039 h2.2
  text "30/0.76" at 54.419,8.931 h2.2
  text "2.1A/4.1A" at 62.095,7.531 h2.2
  text "32/0.80" at 54.419,7.432 h2.2
  text "mm" at 71.106,6.694 h2.2
  text "2.5" at 74.192,6.671 h2.2
  text "3.0" at 78.175,6.671 h2.2
  text "3.5" at 83.185,6.671 h2.2
  text "4.0" at 88.138,6.671 h2.2
  text "2.4A/4.9A" at 62.094,6.041 h2.2
  text "40/1.00" at 54.416,5.982 h2.2
  text "mil" at 71.31,4.694 h2.2
  text "98" at 74.378,4.673 h2.2
  text "118" at 78.167,4.641 h2.2
  text "138" at 83.04,4.641 h2.2
  text "157" at 88.007,4.651 h2.2
  text "0" at 1.5,1.5 h2.5
  text "1" at 11.5,1.5 h2.5
  text "2" at 21.5,1.5 h2.5
  text "3" at 31.5,1.5 h2.5
  text "4" at 41.5,1.5 h2.5
  text "5" at 51.5,1.5 h2.5
  text "6" at 61.5,1.5 h2.5
  text "7" at 71.5,1.5 h2.5
  text "8" at 81.5,1.5 h2.5
  text "9" at 91.5,1.5 h2.5
Bottom Overlay:
  circle w0.152: c3.9,24.5 r0.4
  circle w0.152: c3.9,24.5 r0.1
  circle w0.152: c4.775,8.9 r0.1
  circle w0.152: c4.775,8.9 r0.4
  lines w0.152: 3.6,25.2 3.899,25.499 ; 3.776,8.899 4.075,8.6 ; 3.9,24.5 3.9,25.499 4.199,25.2 ; 4.075,9.199 3.776,8.9 4.775,8.9 ; 11.5,16.1 12.206,16.806 ; 11.694,10.916 11.694,10.494 ; 11.783,16.807 12.205,16.807 12.206,16.806 ; 12.117,10.493 11.695,10.493 11.694,10.494 ; 12.206,16.384 12.206,16.806 ; 12.4,11.2 11.694,10.494 ; 16.894,9.816 16.894,9.394 ; 17.317,9.393 16.895,9.393 16.894,9.394 ; 17.725,10.225 16.894,9.394 ; 18.901,9.6 19.2,9.301 19.2,10.3 ; 19.201,9.301 19.5,9.6 ; 19.4,16.9 20.106,17.606 ; 19.683,17.607 20.105,17.607 20.106,17.606 ; 20.106,17.184 20.106,17.606 ; 20.6,10.3 21.506,9.394 ; 21.084,9.394 21.506,9.394 ; 21.507,9.817 21.507,9.395 21.506,9.394 ; 26.894,13.216 26.894,12.794 ; 27.317,12.793 26.895,12.793 26.894,12.794 ; 27.4,19 28.106,19.706 ; 27.6,13.5 26.894,12.794 ; 27.683,19.707 28.105,19.707 28.106,19.706 ; 28.106,19.284 28.106,19.706 ; 35.294,14.616 35.294,14.194 ; 35.4,20.3 36.106,21.006 ; 35.683,21.007 36.105,21.007 36.106,21.006 ; 35.717,14.193 35.295,14.193 35.294,14.194 ; 36,14.9 35.294,14.194 ; 36.106,20.584 36.106,21.006 ; 44,23 44.706,23.706 ; 44.283,23.707 44.705,23.707 44.706,23.706 ; 44.494,17.416 44.494,16.994 ; 44.706,23.284 44.706,23.706 ; 44.917,16.993 44.495,16.993 44.494,16.994 ; 45.2,17.7 44.494,16.994
  lines w0.2: 45.9,4.7 45.9,16.7 59.1,16.7 59.1,4.7 45.9,4.7 ; 61.1,25.75 73.4,25.75 73.4,28.5 61.1,28.5 61.1,25.75
  text "1/8" at 85.7,31.7 h2 r90
  text "Arc 3mm" at 98.2,30.2 h2.2 r1
  text "Arc 1mm" at 1.6,29.1 h2.2 r90
  text "3" at 13.3,29 h2.5
  text "2" at 38.7,29 h2.5
  text "1" at 64.1,29 h2.5
  text "0" at 89.5,29 h2.5
  text "0402" at 53.1,27.6 h2.2
  text "S" at 63.7,26.4 h3
  text "0603" at 53.1,25.7 h2.2
  text "29" at 76.1,23.671 h2.2
  text "27" at 79.1,23.671 h2.2
  text "25" at 82.1,23.671 h2.2
  text "23" at 85.1,23.671 h2.2
  text "22" at 88.1,23.671 h2.2
  text "21" at 91.1,23.671 h2.2
  text "0805" at 53.1,23.6 h2.2
  text "AWG (approx.)" at 73.4,23.6 h2.2
  text "QFN 0.4 24" at 46.7,23 h2.2 r45
  text "TO-252AA" at 48.8,22.6 h2.2 r45
  text "max. Current (A)" at 73.2,21.62 h2.2
  text "1.4" at 76.1,21.62 h2.2
  text "1.7" at 79.1,21.62 h2.2
  text "2.0" at 82.3,21.62 h2.2
  text "2.4" at 85.3,21.62 h2.2
  text "2.7" at 88.3,21.62 h2.2
  text "3.0" at 91.3,21.62 h2.2
  text "1206" at 52.9,21.1 h2.2
  text "QFN 0.4 48" at 38.1,20.4 h2.2 r45
  text "SOT223-3" at 39.9,19.707 h2.2 r45
  text "QFN 0.5 48" at 29.8,18.9 h2.2 r45
  text "Thickness=1.6mm" at 72.6,18.6 h2.2
  text "1210" at 52.8,17.8 h2.2
  text "SOT89-3" at 30.9,17.6 h2.2 r45
  text "LQFP 0.5 48" at 21.9,16.8 h2.2 r45
  text "UFBGA176" at 14,15.9 h2.2 r45
  text "SOT363-6" at 16.2,15.9 h2.2 r45
  text "Font (mm/mil)" at 58,15.7 h2.2 r90
  text "20" at 76.1,15.671 h2.2
  text "19" at 78.9,15.673 h2.2
  text "18" at 81.9,15.671 h2.2
  text "17" at 84.9,15.671 h2.2
  text "15" at 87.9,15.671 h2.2
  text "13" at 90.9,15.671 h2.2
  text "AWG (approx.)" at 73.4,15.6 h2.2
  text "0.75/30" at 55.78,15.076 h1.51
  text "SOT23" at 21.6,14 h2.2 r45
  text "max. Current (A)" at 73.2,13.673 h2.2
  text "3.5" at 79.3,13.673 h2.2
  text "6.0" at 91.3,13.673 h2.2
  text "3.2" at 76.3,13.635 h2.2
  text "3.8" at 82.3,13.635 h2.2
  text "4.1" at 85.369,13.635 h2.2
  text "4.8" at 88.4,13.635 h2.2
  text "1.0/40" at 55.765,13.201 h2.01
  text "1.3/50" at 55.755,11.052 h2.62
  text "T. increase=20°C" at 72.6,9.8 h2.2
  text "1.5/60" at 55.748,8.352 h3.02
  text "Arc 2mm" at 99.263,7.55 h2.2 r90
  text "11" at 75.8,6.7 h2.2
  text "9" at 79.6,6.671 h2.2
  text "8" at 84.6,6.671 h2.2
  text "7" at 89.5,6.671 h2.2
  text "AWG (approx.)" at 73.4,6.6 h2.2
  text "Mark Point" at 9.1,6.4 h2.2
  text "2.0/80" at 55.765,5.5 h4.03
  text "max. Current (A)" at 73.2,4.651 h2.2
  text "7.2" at 76.3,4.651 h2.2
  text "8.2" at 80.3,4.651 h2.2
  text "9.3" at 85.3,4.651 h2.2
  text "10.3" at 90.5,4.651 h2.2
  text "cesforchina" at 45,4 h2.5
  text "Powered by github.com/jbtronics" at 23.25,3.95 h2
  text "JLCJLCJLCJLC" at 34.25,3.95 h1.8
  text "9" at 6.5,1.5 h2.5
  text "8" at 16.5,1.5 h2.5
  text "7" at 26.5,1.5 h2.5
  text "6" at 36.5,1.5 h2.5
  text "5" at 46.5,1.5 h2.5
  text "4" at 56.5,1.5 h2.5
  text "3" at 66.5,1.5 h2.5
  text "2" at 76.5,1.5 h2.5
  text "1" at 86.5,1.5 h2.5
  text "0" at 96.5,1.5 h2.5
Top Solder:
  lines w0.15: 45.75,24.5 52.75,24.5
  lines w0.2: 45.75,23 52.75,23
  lines w0.25: 45.75,21.5 52.75,21.5
  lines w0.3: 45.75,20 52.75,20
  lines w0.35: 45.75,18.5 52.75,18.5
  lines w0.4: 45.75,17 52.75,17
  lines w0.45: 45.75,15.5 52.75,15.5
  lines w0.5: 45.75,14 52.75,14
  lines w0.6: 45.75,12.5 52.75,12.5
  lines w0.7: 45.75,11 52.75,11
  lines w0.76: 45.75,9.5 52.75,9.5
  lines w0.8: 45.75,8 52.65,8
  lines w1: 45.75,6.5 52.55,6.5
  text "A" at 9,11.5 h20
Bottom Solder:
  text "PCBruler" at 72.4,26.4 h3
Mechanical 1:
  lines w0.254: 0,0 0,9.5 0,10.5 ccw(c-0.038,16.25) 0,22 0,23 0,31 cw(c1,31) 1,32 97,32 cw(c97,29) 100,29 100,21 100,20.75 99.5,20.75 97.5,22.75 96.5,22.75 93,19.25 93,11 97,7 97.5,7 100,9.5 100,9.25 100,9 100,2 cw(c98,2) 98,0 0,0

## Text inside footprints (layer, text, board x,y; h text height)
REF: Top Overlay "1" at 27,29 h2.5; Top Overlay "2" at 52.4,29 h2.5; Top Overlay "3" at 77.8,29 h2.5; Top Overlay "0" at 1.6,29 h2.5
REF: Top Overlay "90" at 7.8,17.2 h2 r270; Top Overlay "30" at 3,23.4 h2 r330; Top Overlay "60" at 6.2,21 h2 r300
REF1: Top Overlay "U" at 28.7,9.523 h2; Top Overlay "R1" at 31.23,11.364 h2 r90; Top Overlay "R2" at 31.23,7.4 h2 r90; Top Overlay "U2" at 31.6,7.5 h2; Top Overlay "U2=U" at 32.4,12.1 h2; Top Overlay "R2" at 37.519,12.896 h2; Top Overlay "R1+R2" at 36.6,11.3 h2